# Altium PCB PCB.PcbDoc
Units mm, origin at the board's own origin, x right, y up, seen from the top; angles counter-clockwise.
Board outline 44.8 x 15 mm, 2 copper layers (Top Layer, Bottom Layer), stack 1.18 mm thick; 6 components, 13 nets, 41 pads, 7 vias.
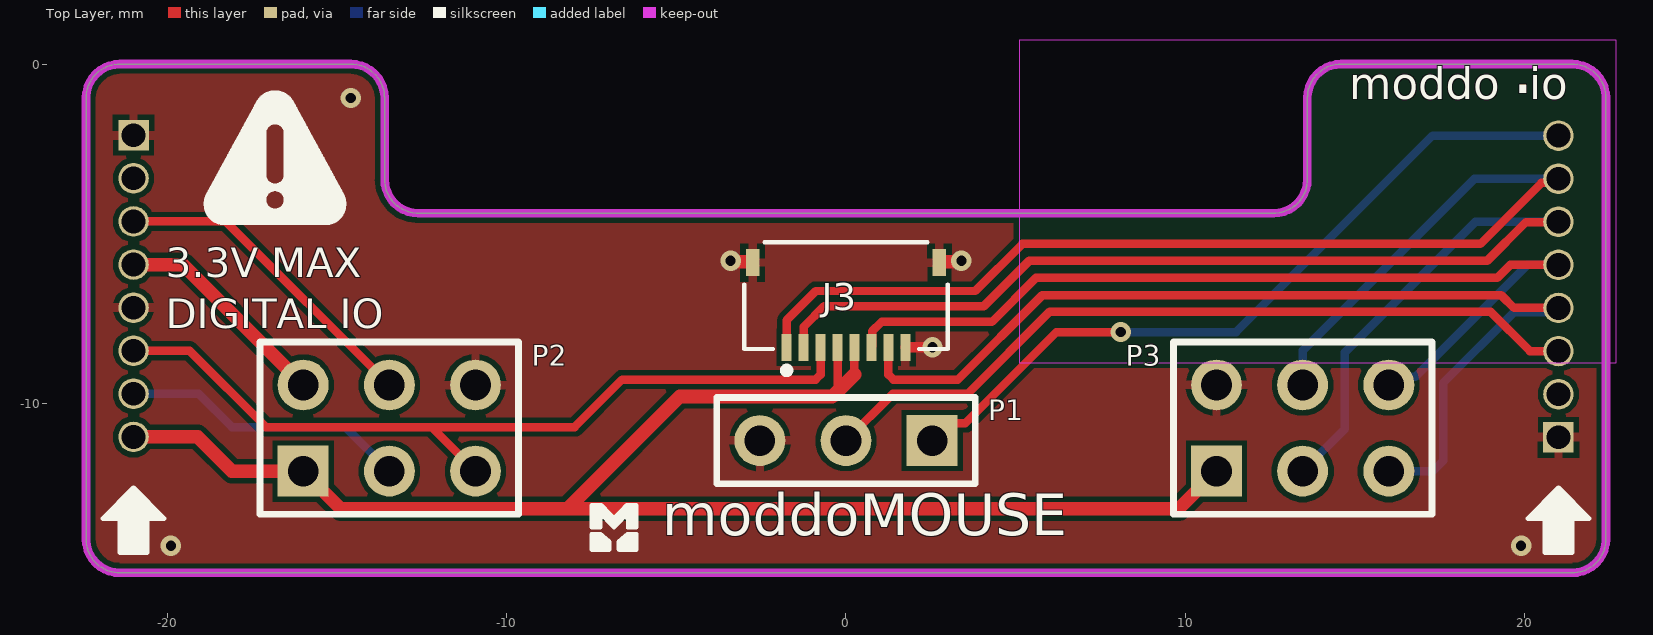
[diagram p0: Top Layer view]
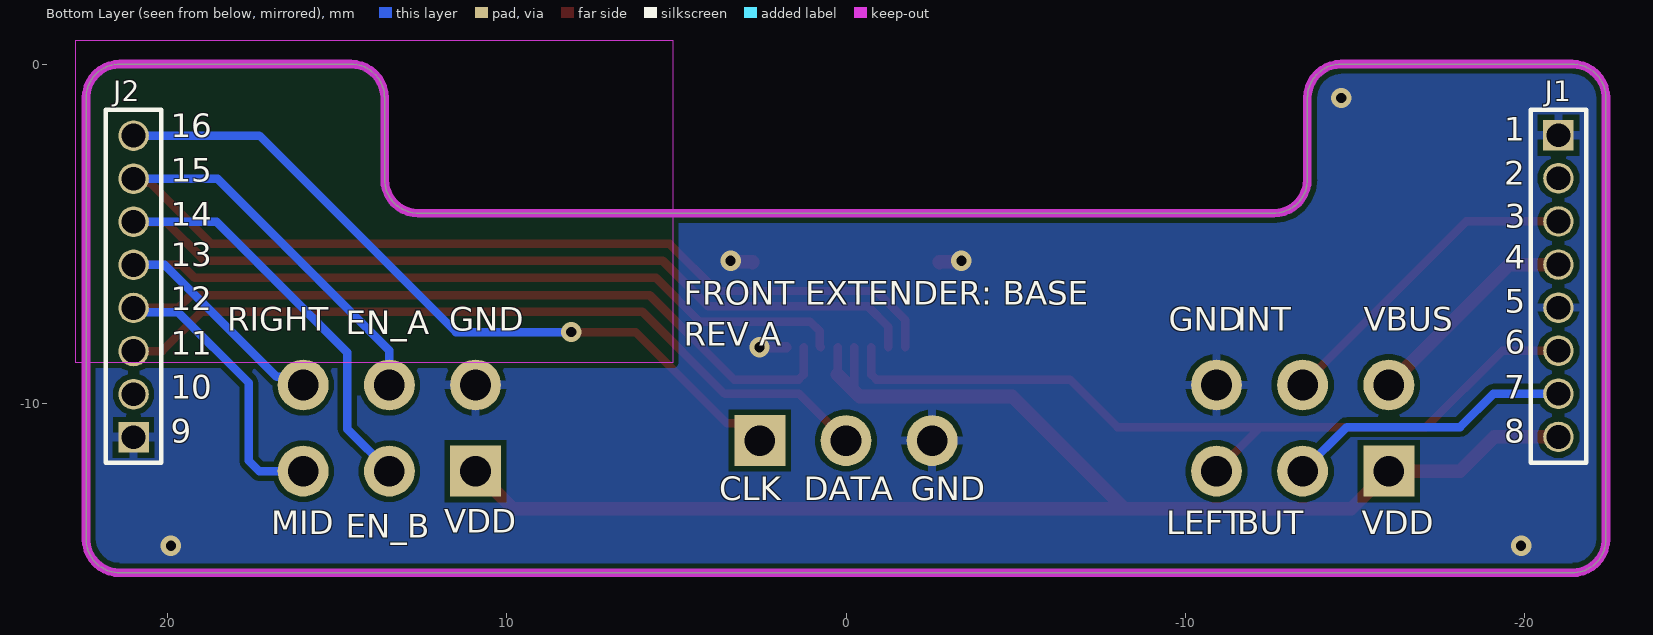
[diagram p1: Bottom Layer view, seen from below]

## Layer stack, top to bottom
Top Solder: solder mask 0.0102, Solder Resist, Dk 3.5
Top Layer: signal copper 0.0356
Dielectric 1: dielectric 1.1086, FR-4, Dk 4.8
Bottom Layer: signal copper 0.0356
Bottom Solder: solder mask 0.0102, Solder Resist, Dk 3.5

## Board outline
-21.4,-15 cw(c-21.4,-14) -22.4,-14 -22.4,-1 cw(c-21.4,-1) -21.4,0 -14.6,0 cw(c-14.6,-1) -13.6,-1 -13.6,-3.4 ccw(c-12.6,-3.4) -12.6,-4.4 12.6,-4.4 ccw(c12.6,-3.4) 13.6,-3.4 13.6,-1 cw(c14.6,-1) 14.6,0 21.4,0 cw(c21.4,-1) 22.4,-1 22.4,-14 cw(c21.4,-14) 21.4,-15

## Design rules (kind name [scope] priority, off if disabled: settings)
BoardOutlineClearance [All] p1: gap=0.2 ignorepadtopadclearanceinfootprint=FALSE
Clearance GND_bot [InNamedPolygon('GND_bot')] p1: gap=0.2 ignorepadtopadclearanceinfootprint=FALSE
Clearance GND_top [InNamedPolygon('GND_top')] p2: gap=0.1 ignorepadtopadclearanceinfootprint=FALSE
Clearance [All] p3: gap=0.16 ignorepadtopadclearanceinfootprint=FALSE
HoleSize [All] p1: absolutevalues=TRUE maxlimit=20 minlimit=0.025 maxpercent=80.000 minpercent=20.000
MinimumSolderMaskSliver [All] p1: minsoldermaskwidth=0.05
PolygonConnect [All] p1: thpad.connectstyle=Relief thpad.reliefconductorwidth=0.254 thpad.reliefentries=4 thpad.polygonreliefangle="90 Angle" thpad.airgapwidth=0.16 smdpad.connectstyle=Relief smdpad.reliefconductorwidth=0.254 smdpad.reliefentries=4 smdpad.polygonreliefangle="90 Angle" smdpad.airgapwidth=0.16 via.connectstyle=Direct via.reliefconductorwidth=0.254 via.reliefentries=4 via.polygonreliefangle="90 Angle" via.airgapwidth=0.254
RoutingVias [All] p1: holewidth=0.3 width=0.4 viastyle="Through Hole" minholewidth=0.3 minwidth=0.4 maxholewidth=2 maxwidth=10
SilkToSilkClearance [All] p1: silktosilkclearance=0.01
SilkToSolderMaskClearance [IsPad] p1: minsilkscreentomaskgap=0.001 clearancetoexposedcopper=TRUE
SolderMaskExpansion [All] p1: expansion=0.05 istentingtop=FALSE
SupplyNets "Schematic Supply Nets_1" [InNet('GND')] p1: voltage=0.000
SupplyNets "Schematic Supply Nets" [InNet('VDD_EXP')] p2: voltage=0.000
SupplyNets "Schematic Supply Nets_2" [InNet('VBUS')] p3: voltage=0.000
UnRoutedNet [All] p1: checkbadconnections=TRUE
Width [All] p1: maxlimit=2.54 minlimit=0.089 preferedwidth=0.254
25 further rules are at their usual default settings.

## Components (designator, comment, footprint, x,y, rotation, side; value= is the part's Value field where it differs from the comment)
J1 "1.27mm_8pins" 1.27mm_8pins_MaleHeader -21,-2.1 r270 bottom
J2 "1.27mm_8pins" 1.27mm_8pins_MaleHeader 21,-11 r90 bottom
J3 "2328702-8" 2328702-8 0,-5 r180 top
P1 "Header 3" HDR1X3 2.54,-11.1 r180 top
P2 "Header 3X2" HDR2X3 -16,-12 r0 top
P3 "Header 3X2" HDR2X3 10.92,-12 r0 top

## Footprints (in the part's own frame and the unit in brackets; to place one, negate y for a bottom-side part, rotate by r counter-clockwise, add the part's x,y. Pads: shape width x height; smd on the part's side, far side on the other; paste and mask are expansions set on the pad)
1.27mm_8pins_MaleHeader [mm]
  rect 0.9x0.9 hole 0.7 mask+0.05: 1(0,0)
  round 0.9 hole 0.7 mask+0.05: 2(1.27,0) 3(2.54,0) 4(3.81,0) 5(5.08,0) 6(6.35,0) 7(7.62,0) 8(8.89,0)
  silkscreen extent -0.75,-0.82 9.65,0.82, body extent -0.83,-0.9 9.73,0.9, height 4.55
2328702-8 [mm]
  rect 0.3x0.8 smd mask+0.05: 1(1.75,3.35) 2(1.25,3.35) 3(0.75,3.35) 4(0.25,3.35) 5(-0.25,3.35) 6(-0.75,3.35) 7(-1.25,3.35) 8(-1.75,3.35)
  rect 0.4x0.8 smd mask+0.05: S1(2.75,0.85) S2(-2.75,0.85)
  silkscreen extent -3,0.25 3,4.13, body extent -3,0.25 3,4.08, height 1.06
HDR1X3 [mm] "Connector; Header; 3 Position"
  rect 1.5x1.5 hole 0.9: 1(0,0)
  round 1.5 hole 0.9: 2(2.54,0) 3(5.08,0)
  silkscreen extent -1.27,-1.27 6.35,1.27
HDR2X3 [mm] "Connector; Header; 3x2 Position"
  rect 1.5x1.5 hole 0.9: 1(0,0)
  round 1.5 hole 0.9: 2(0,2.54) 3(2.54,0) 4(2.54,2.54) 5(5.08,0) 6(5.08,2.54)
  silkscreen extent -1.27,-1.27 6.35,3.81

## Part data
J3: "FFC/FPC Connector, 8 Contact(s), 1 Row(s), Right Angle, Solder Terminal, Natural Insulator", Actuator Color=Black, Flammability Rating="UL94 V-0", Housing Color=Natural, Manufacturer="TE Connectivity", Max Operating Temperature=85°C, Min Operating Temperature=-40°C, Operating Supply Voltage=50V, Actuator Material=Thermoplastic, Category="FFC / FPC", ComponentLink1Description=https://www.te.com/commerce/DocumentDelivery/DDEController?Action=srchrtrv&amp;DocNm=2328702&amp;DocType=Customer+Drawing&amp;DocLang=English&src-supplier=Digikey, ComponentLink1URL=https://www.te.com/commerce/DocumentDelivery/DDEController?Action=srchrtrv&amp;DocNm=2328702&amp;DocType=Customer+Drawing&amp;DocLang=English&src-supplier=Digikey, Connector System=Wire-to-Board, Contact Material="Copper Alloy", Contact Plating=Gold, Gender=Receptacle, Height=1mm, Housing Material=Thermoplastic, Length=6mm, Manufacturer Part Number=2328702-8, Mounting Technology="Surface Mount", Number of Contacts=8, Number of Positions=8, Number of Rows=1, Orientation="Right Angle", Packaging="Cut Tape", Plating=Gold, Pricing 1="28000=0.0961 (USD)", RoHS=Yes, Sealable="No (Without)", Series=-, Stock 1=56000, Supplier 1="Arrow Electronics", Supplier Part Number 1=2328702-8, Termination=Solder, Voltage Rating=50V
P1: "Header, 3-Pin", LatestRevisionDate=17-Jul-2002, LatestRevisionNote="Re-released for DXP Platform.", Publisher="Altium Limited"
P2 P3: "Header, 3-Pin, Dual row", LatestRevisionDate=17-Jul-2002, LatestRevisionNote="Re-released for DXP Platform.", Publisher="Altium Limited"

## Via types
v1: diameter 0.6, hole 0.3, Top Layer to Bottom Layer, tented both sides, 7 vias

## Nets (pads, with @x,y where several pads share a name; then routed paths per layer and width w, separated by ;. In a path a pad name is that pad's centre, name@x,y a point inside that pad or via, vN(x,y) a via of type N, cw(c..) or ccw(c..) an arc to the next point about the centre after c; other vN are vias at no path point)
BUTTON: J1.7 P2.3 | length 8.5
  Bottom Layer w0.25: J1.7 -19.08,-9.72 -18.1,-10.7 -14.76,-10.7 P2.3
CLICK_LEFT: J1.6 J3.3 P2.5 | length 24.5
  Top Layer w0.25: J1.6 -19.35,-8.45 -17.1,-10.7 -12.22,-10.7 ; P2.5 -12.22,-10.7 ; J3.3 -0.75,-9.154 -0.897,-9.3 -6.6,-9.3 -8,-10.7 -12.22,-10.7
CLICK_MIDDLE: J2.4 J3.7 P3.5 | length 30.1
  Top Layer w0.25: J3.7 1.25,-9.154 1.396,-9.3 3.3,-9.3 5.785,-6.815 19.315,-6.815 19.69,-7.19 J2.4
  Bottom Layer w0.25: P3.5 17.3,-12 17.6,-11.7 17.6,-9.4 19.686,-7.314 20.876,-7.314 J2.4
CLICK_RIGHT: J2.5 J3.6 P3.6 | length 28
  Top Layer w0.25: J3.6 0.775,-8.325 0.775,-7.872 1.047,-7.6 4.3,-7.6 5.6,-6.3 19.2,-6.3 19.58,-5.92 J2.5
  Bottom Layer w0.25: P3.6 16.239,-9.221 16.779,-9.221 20.08,-5.92 J2.5
ENC_A: J2.7 J3.1 P3.4 | length 35.9
  Top Layer w0.25: J3.1 -1.75,-7.55 -0.89,-6.69 3.81,-6.69 5.2,-5.3 18.7,-5.3 20.496,-3.504 20.876,-3.504 J2.7
  Bottom Layer w0.25: P3.4 13.465,-9.455 13.465,-8.435 18.52,-3.38 J2.7
ENC_B: J2.6 J3.2 P3.3 | length 36
  Top Layer w0.25: J3.2 -1.25,-7.75 -0.639,-7.139 4.061,-7.139 5.4,-5.8 18.9,-5.8 20.042,-4.658 20.992,-4.658 J2.6
  Bottom Layer w0.25: P3.3 14.7,-10.76 14.7,-8.5 18.55,-4.65 J2.6
FRONT_GPIO: J1.2
FRONT_INT: J1.3 P2.4 | length 9.5
  Top Layer w0.25: J1.3 -18.28,-4.64 P2.4
GND: J1.1 J1.5 J2.1 J3.8 J3.S1 J3.S2 P1.3 P2.6 P3.2 | length 2.2
  Top Layer w0.3: J3.8 v1(2.55,-8.35)
  Top Layer w0.4: v1(-3.4,-5.8) -3.375,-5.825 -2.75,-5.825 J3.S1 ; J3.S2 2.75,-5.825 3.375,-5.825 v1(3.4,-5.8)
  other v1: -19.9,-14.2 19.9,-14.2 -14.6,-1
I2C_FRONT_CLK: J2.8 P1.1 | length 22.2
  Top Layer w0.25: P1.1 3.059,-10.581 3.519,-10.581 6.2,-7.9 v1(8.1,-7.9)
  Bottom Layer w0.25: v1(8.1,-7.9) 11.5,-7.9 17.29,-2.11 J2.8
I2C_FRONT_DATA: J2.3 P1.2 | length 23.1
  Top Layer w0.25: P1.2 1.377,-9.723 3.577,-9.723 6,-7.3 19,-7.3 20.16,-8.46 J2.3
VBUS: J1.4 P2.2 | length 6.5
  Top Layer w0.4: J1.4 -19.55,-5.91 P2.2
VDD_EXP: J1.8 J3.4 J3.5 P2.1 P3.1 | length 45.5
  Top Layer w0.25: -0.25,-9.65 J3.4 ; 0.25,-9.15 J3.5
  Top Layer w0.4: J1.8 -19.11,-10.99 -18.1,-12 P2.1 -14.89,-13.11 -8.21,-13.11 ; 0.25,-9.15 -0.25,-9.65 -0.4,-9.8 -4.9,-9.8 -8.21,-13.11 ; P3.1 9.81,-13.11 -8.21,-13.11
pads on no net: J2.2

## Polygon pours and split planes (outlines as drawn)
GND on Bottom Layer "GND_L02_P001" (solid, pour order 1): -21.4,-15 cw(c-21.4,-14) -22.4,-14 -22.4,-1 cw(c-21.4,-1) -21.4,0 -14.6,0 cw(c-14.6,-1) -13.6,-1 -13.6,-3.4 ccw(c-12.6,-3.4) -12.6,-4.4 12.6,-4.4 ccw(c12.6,-3.4) 13.6,-3.4 13.6,-1 cw(c14.6,-1) 14.6,0 21.4,0 cw(c21.4,-1) 22.4,-1 22.4,-14 cw(c21.4,-14) 21.4,-15
GND on Top Layer "GND_L01_P000" (solid, pour order 0): -21.4,-15 cw(c-21.4,-14) -22.4,-14 -22.4,-1 cw(c-21.4,-1) -21.4,0 -14.6,0 cw(c-14.6,-1) -13.6,-1 -13.6,-3.4 ccw(c-12.6,-3.4) -12.6,-4.4 12.6,-4.4 ccw(c12.6,-3.4) 13.6,-3.4 13.6,-1 cw(c14.6,-1) 14.6,0 21.4,0 cw(c21.4,-1) 22.4,-1 22.4,-14 cw(c21.4,-14) 21.4,-15

## Keep-outs
Top Layer:
  rectangle: 5.1,-8.8 22.7,0.7
Bottom Layer:
  rectangle: 5.1,-8.8 22.7,0.7
Keep-Out Layer:
  the board outline again, w0.254

## Silkscreen, mask and mechanical layers (free items; w line width, h text height)
Top Overlay:
  drawing of 58 lines, arcs and shapes, not listed
  text "moddo" at 14.836,-1.344 h1.6
  text "." at 19.636,-1.344 h2.5
  text "io" at 20.136,-1.344 h1.6
  text "3.3V MAX / DIGITAL IO" at -20.05,-8.08 h1.5
  text "moddoMOUSE" at -5.42,-14.3 h2.1
Bottom Overlay:
  text "16" at 19.9,-2.4 h1.2
  text "1" at -19.4,-2.5 h1.2
  text "15" at 19.9,-3.7 h1.2
  text "2" at -19.4,-3.8 h1.2
  text "14" at 19.9,-5 h1.2
  text "3" at -19.421,-5.068 h1.2
  text "13" at 19.9,-6.2 h1.2
  text "4" at -19.421,-6.268 h1.2
  text "12" at 19.9,-7.5 h1.2
  text "5" at -19.421,-7.568 h1.2
  text "VBUS" at -15.257,-8.1 h1.2
  text "INT" at -11.532,-8.1 h1.2
  text "GND" at -9.508,-8.1 h1.2
  text "GND" at 11.692,-8.1 h1.2
  text "RIGHT" at 18.233,-8.1 h1.2
  text "EN_A" at 14.744,-8.2 h1.2
  text "FRONT EXTENDER: BASE / REV A" at 4.78,-8.532 h1.2
  text "6" at -19.421,-8.768 h1.2
  text "11" at 19.9,-8.8 h1.2
  text "7" at -19.4,-10.1 h1.2
  text "10" at 19.9,-10.1 h1.2
  text "8" at -19.4,-11.4 h1.2
  text "9" at 19.9,-11.4 h1.2
  text "GND" at -1.908,-13.1 h1.2
  text "DATA" at 1.253,-13.1 h1.2
  text "CLK" at 3.739,-13.1 h1.2
  text "VDD" at 11.84,-14.045 h1.2
  text "VDD" at -15.208,-14.1 h1.2
  text "BUT" at -11.532,-14.1 h1.2
  text "LEFT" at -9.438,-14.1 h1.2
  text "MID" at 16.936,-14.088 h1.2
  text "EN_B" at 14.744,-14.2 h1.2